# EAGLE board BEP32_6panel_Seed_wMilling_tvm802 (EAGLE 6.5.0), part 1 of 5
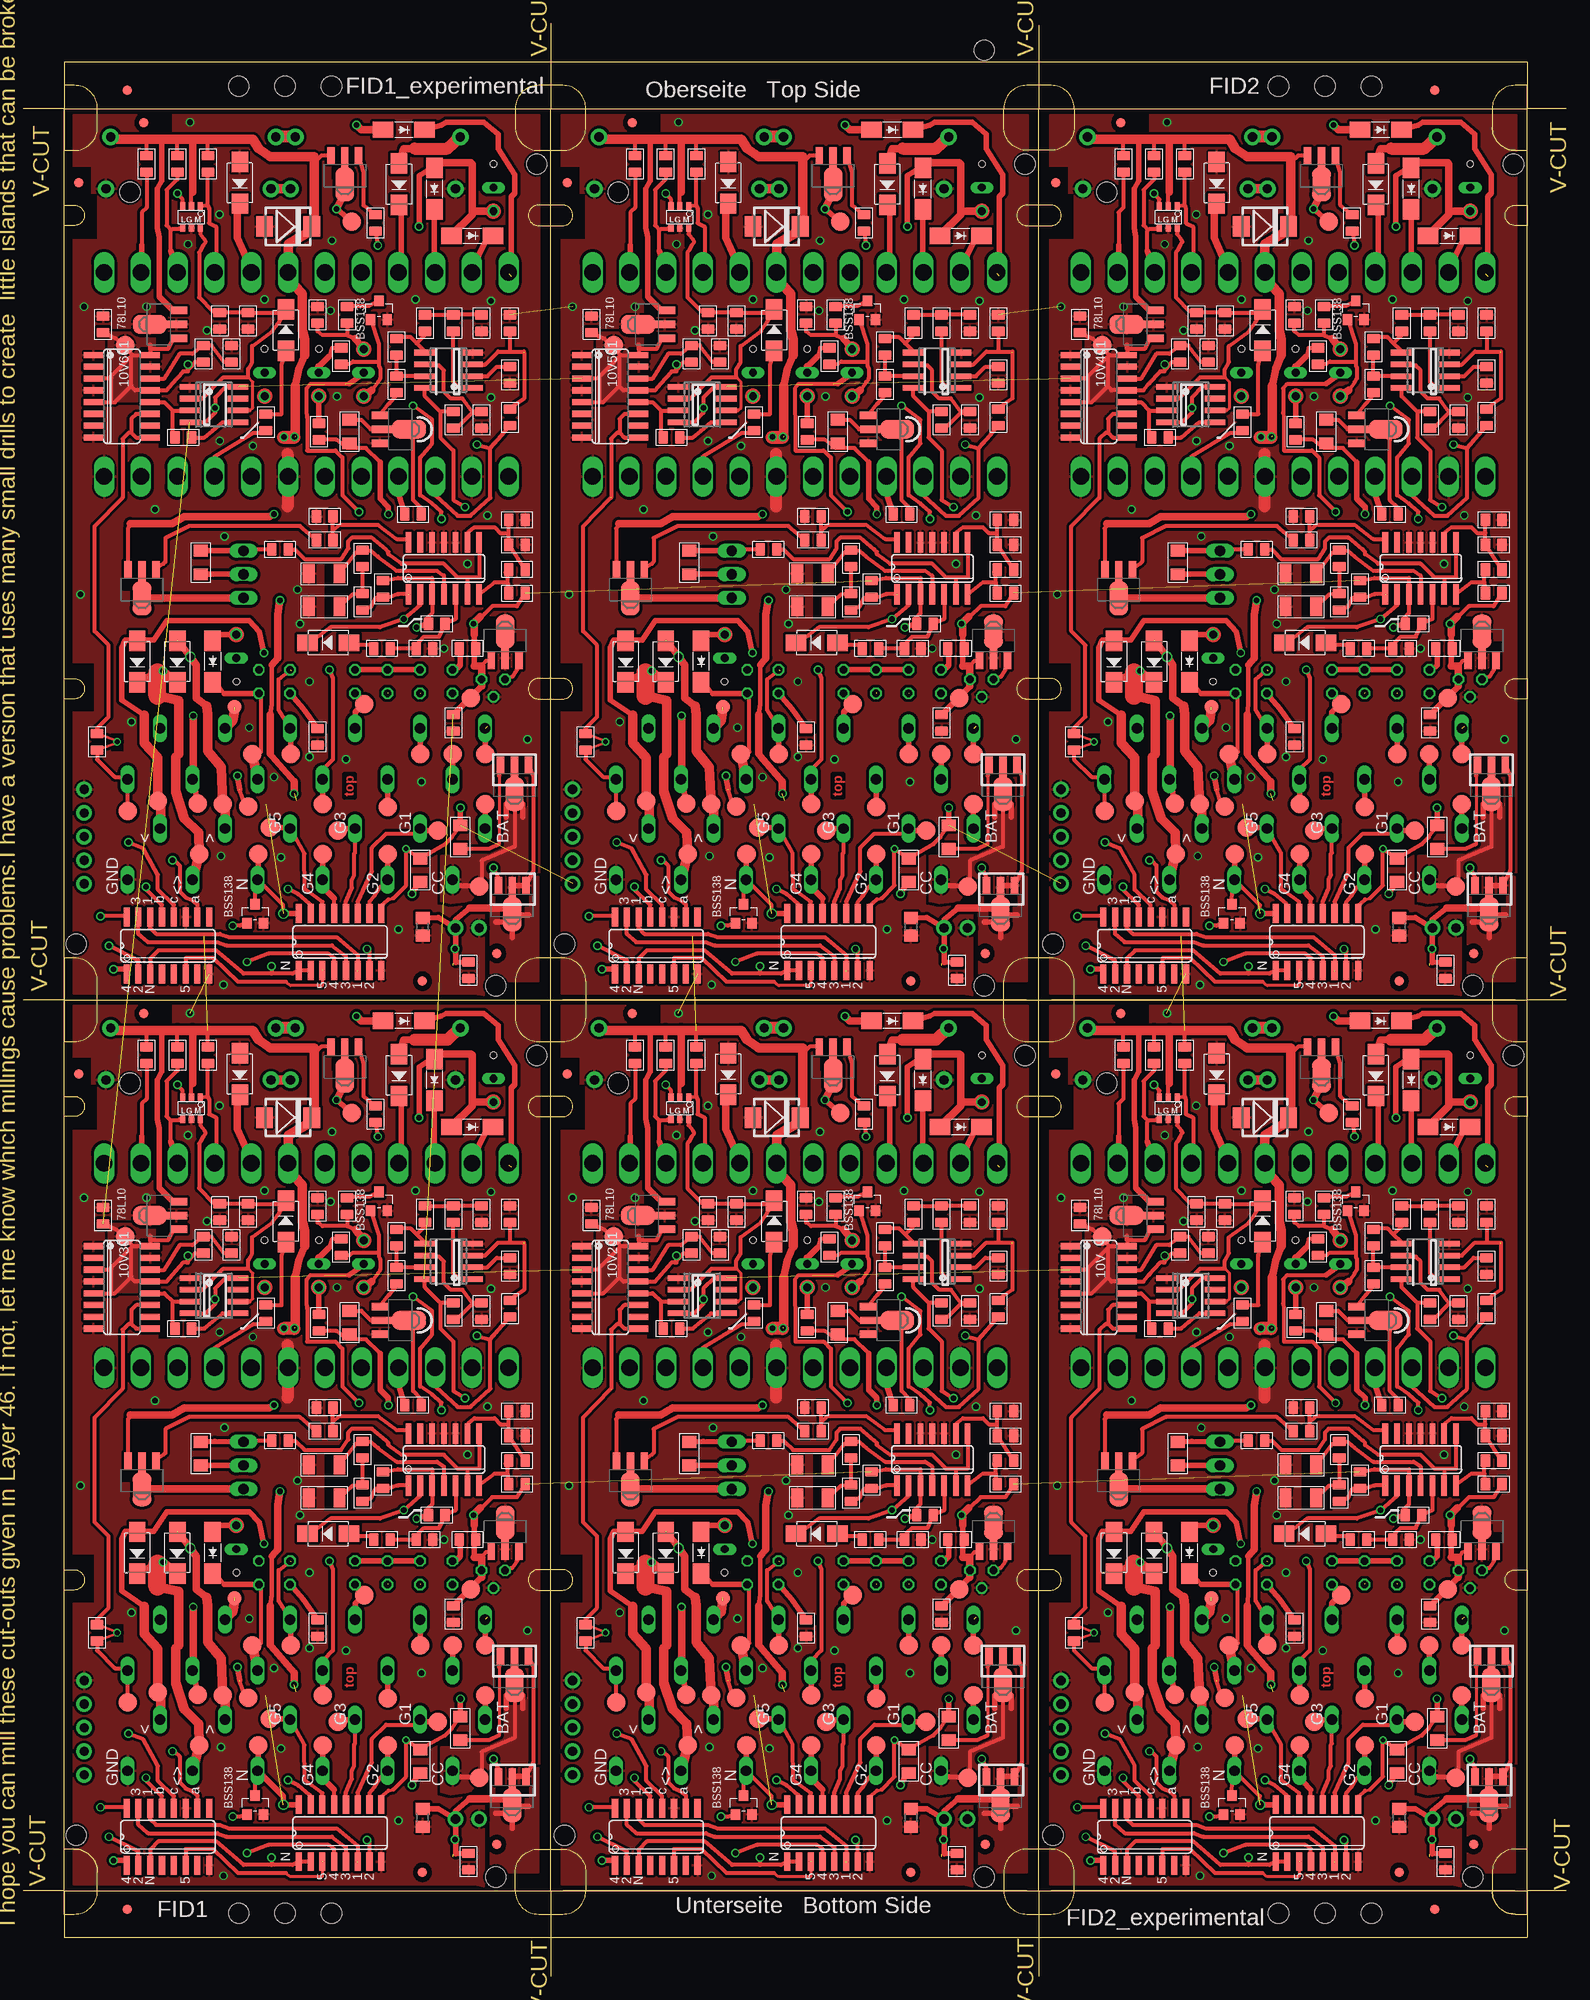
[diagram p0: board, top side]
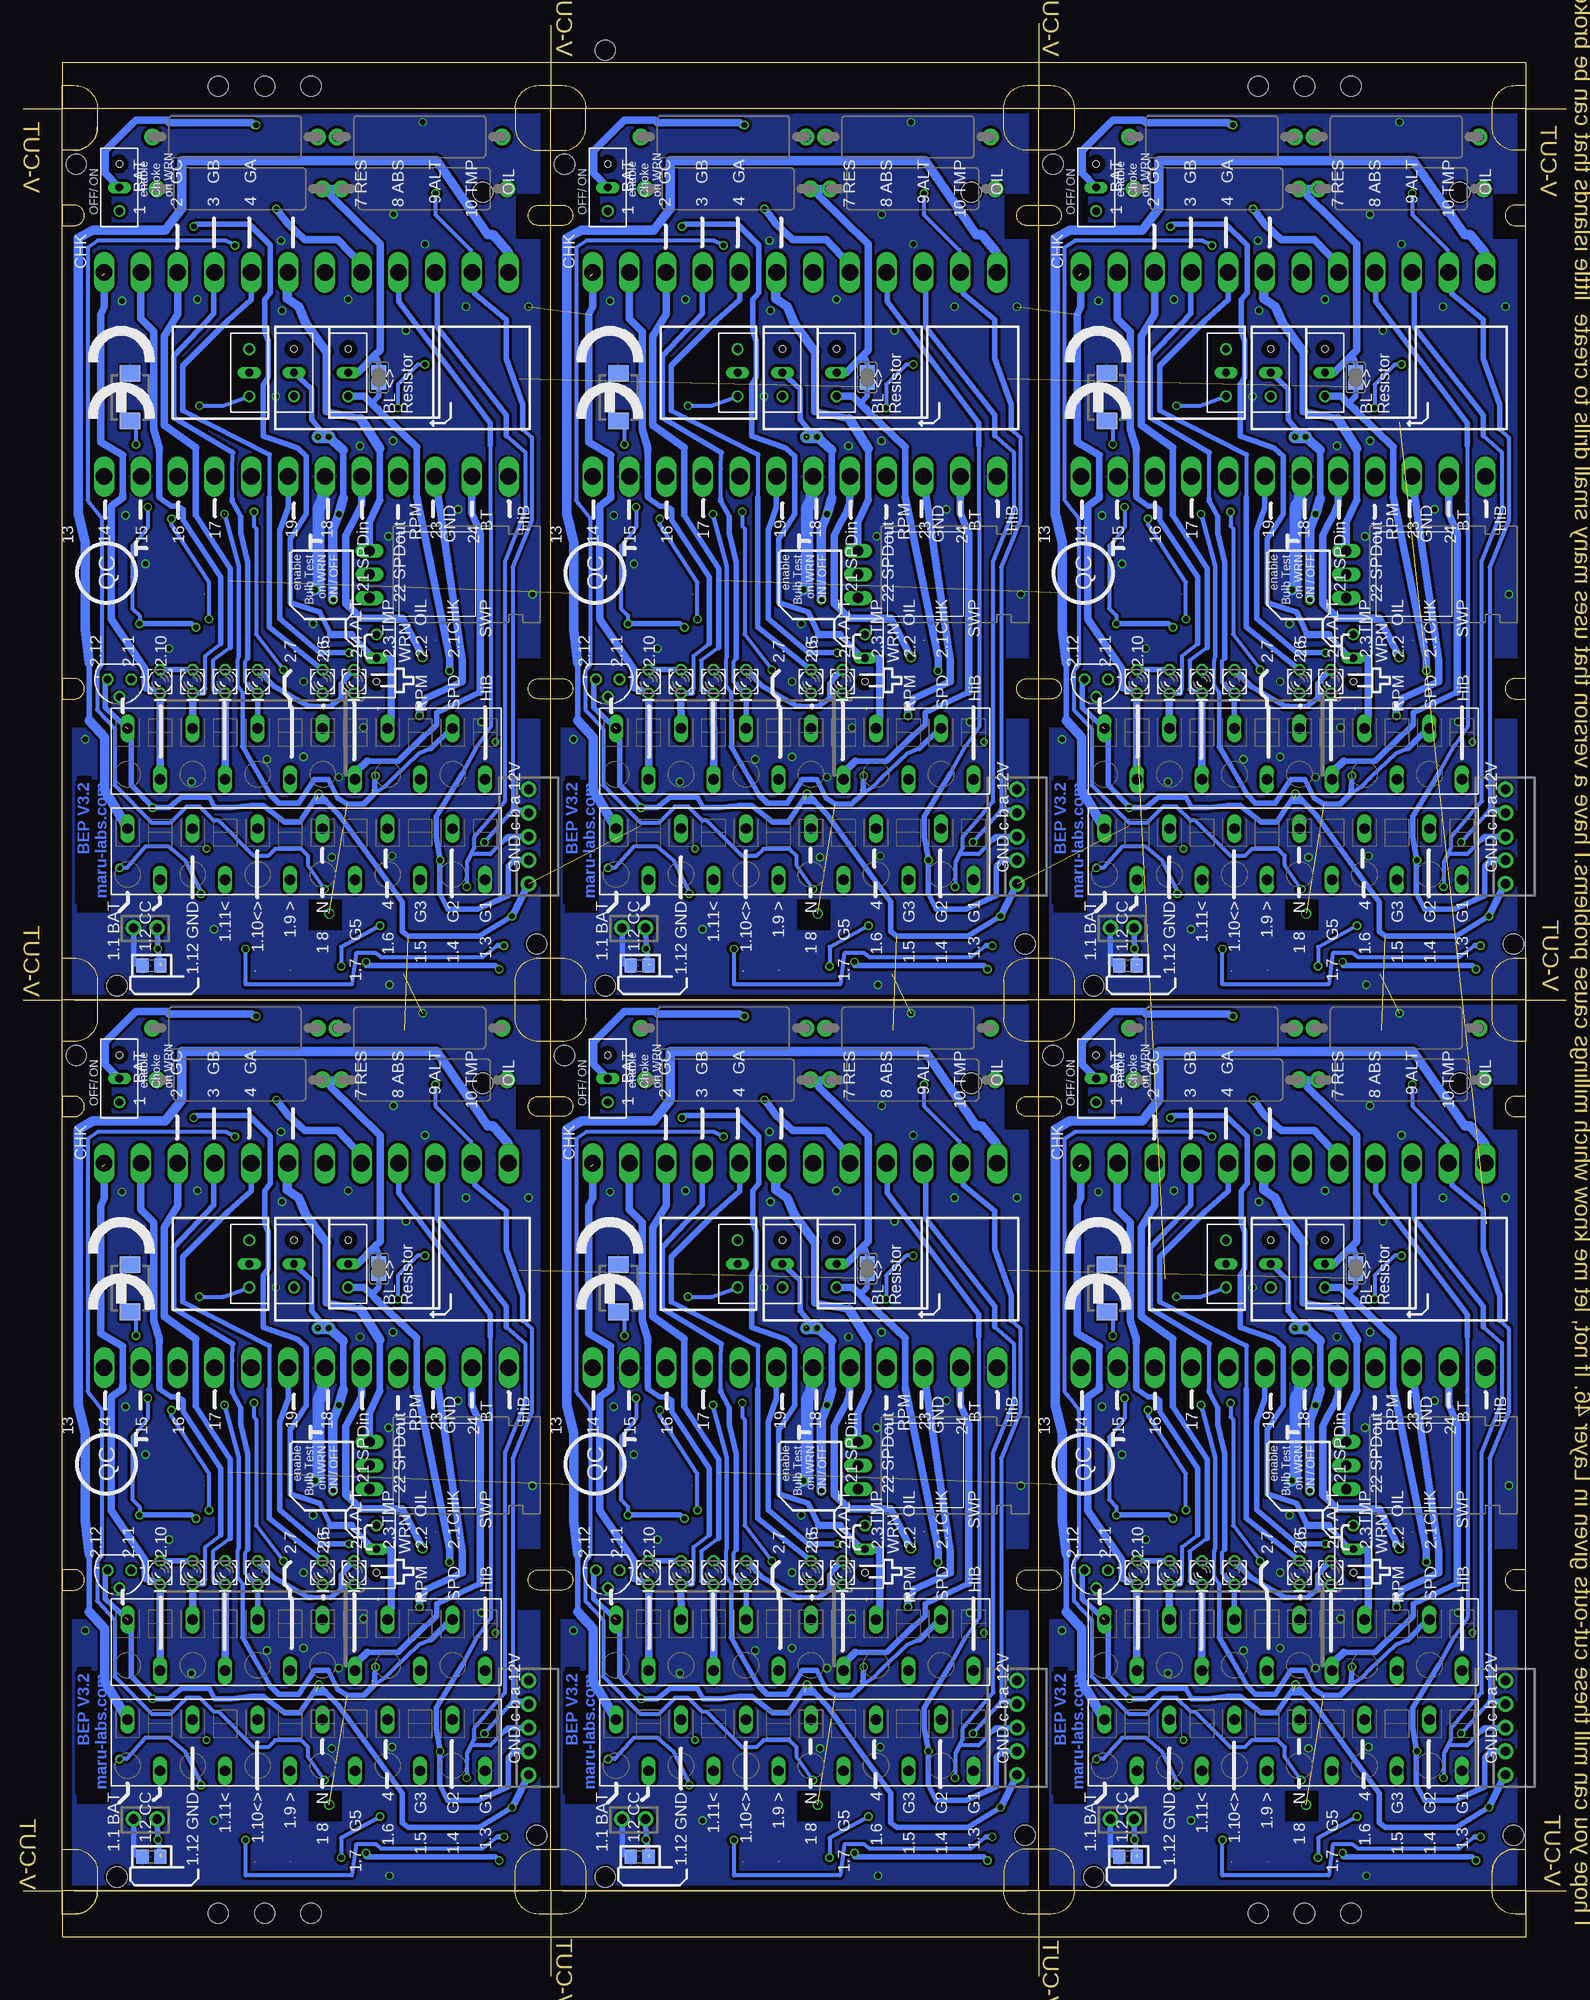
[diagram p1: board, bottom side, seen from below]

Size 166.2 x 210.4 mm. Coordinates in mm from the lower left corner, seen from the top.
Outline: 45 segments
Copper layers (1*16): Top 0.035mm / dielectric 1.5mm / Bottom 0.035mm
Design rules "Vorlage BEP3 und hoeher multi-cb_035um-cu": minimum track width 6mil, minimum drill 12mil, track to track 12mil, track to pad 12mil, pad to pad 6mil, via to via 6mil, smd to smd 6mil, copper to edge 10mil, drill to drill 8mil, minimum pad ring 8mil, minimum via ring 6mil, stop-mask expansion 3mil, vias tented up to drill 0mil, thermal gap 8mil
Holes 2.18 mm at 156.1,10.7 116.7,96.2 103.5,10.7 64.1,96.2 50.9,10.7 11.5,96.2 156.1,106.7 116.7,192.2 103.5,106.7 64.1,192.2 50.9,106.7 11.5,192.2 160.5,195.2 110.9,111.2 160.5,99.2 110.9,15.2 107.9,99.2 107.9,195.2 58.3,111.2 58.3,15.2 55.3,99.2 5.7,15.2 5.7,111.2 55.3,195.2 23.2,6.8 145.2,6.8 140.2,6.8 28.2,6.8 103.5,207.5 23.2,203.6 145.2,203.6 140.2,203.6 28.2,203.6 135.2,6.8 33.2,6.8 33.2,203.6 135.2,203.6
tRestrict: area 137.7,50.2 to 141,56.7; area 114.7,36 to 116,37.9; area 143.4,67.6 to 145.4,69.4; area 115.8,53.3 to 120.1,54.7; area 154.8,46.5 to 159.3,47.8; area 154.9,47.8 to 156.1,50.5; area 156.1,19.2 to 159.6,20.6; area 119.5,79.5 to 120.8,84.2; area 138.4,97.6 to 139.6,99.2; area 123.8,90.3 to 124,91.4; area 119,102.7 to 121.2,104.6; area 109.8,95.6 to 112.5,98.9; 78 more areas
bRestrict: area 156.9,18.6 to 160.4,28.8; area 158.9,28.7 to 160.4,33.3; area 158.9,38.5 to 161.1,45; area 110.5,39.5 to 112.9,46; area 156.7,90.8 to 160.5,96.8; area 131.9,16.7 to 135.5,20; area 110.1,91.2 to 113.1,96; area 104.2,18.6 to 107.8,28.8; area 106.3,28.7 to 107.8,33.3; area 106.3,38.5 to 108.5,45; area 57.9,39.5 to 60.3,46; area 104.1,90.8 to 107.9,96.8; 30 more areas
Milling: 180 lines

## Footprints (pad centres in the part's own frame; a part is rotated, then mirrored left to right if it is on the bottom)
12-PIN = drill 1.118 long: 1 19.25,-2.45; 2 15.75,3.05; 3 12.25,-2.45; 4 8.75,3.05; 5 5.25,-2.45; 6 1.75,3.05; 7 -1.75,-2.45; 8 -5.25,3.05; 9 -8.75,-2.45; 10 -12.25,3.05; 11 -15.75,-2.45; 12 -19.25,3.05
B2.0 = smd 2 x 2: TP 0,0
C0805 = smd 1.397 x 1.016: 1 0,0.889; 2 0,-0.889
C1206 = smd 1.27 x 2.032: 1 -1.651,0; 2 1.651,0
DO214AA = smd 1.8 x 2.2: A 2.55,0; C -2.55,0
DO-214AC = smd 2.2 x 1.77: 1 -2.242,0; 2 2.242,0
DO214AA_BI = smd 1.8 x 2.2: A 2.45,0; C -2.65,0
DO-214AC_SLIM = smd 2.2 x 1.77: 1 -2.242,0; 2 2.242,0
FIDUCIAL_1MM = smd 1 x 1: 1 0,0
FIDUCIAL_1MM_WITH_SOLDERMASK = smd 1 x 1: 1 0,0
SO08 = smd 0.6 x 2.2: 1 -1.905,-2.6; 2 -0.635,-2.6; 3 0.635,-2.6; 4 1.905,-2.6; 5 1.905,2.6; 6 0.635,2.6; 7 -0.635,2.6; 8 -1.905,2.6
SOT89_ROUND = smd 0.8 x 1.8: 1 -1.499,-2.181; 3 1.499,-2.181 | smd 0.8 x 2.3: 2 0,-1.927 | smd 2.032 x 3.65: 2@1 0,0.94
78LXX = drill 0.813 octagon: GND 0,1.905; IN 1.27,0; OUT -1.27,0
SO16 = smd 0.66 x 2.032: 1 -4.445,-3.073; 2 -3.175,-3.073; 3 -1.905,-3.073; 4 -0.635,-3.073; 5 0.635,-3.073; 6 1.905,-3.073; 7 3.175,-3.073; 8 4.445,-3.073; 9 4.445,3.073; 10 3.175,3.073; 11 1.905,3.073; 12 0.635,3.073; 13 -0.635,3.073; 14 -1.905,3.073; 15 -3.175,3.073; 16 -4.445,3.073
SOT457R_PHILIPS = smd 0.55 x 0.8: 1 -0.95,-1.2; 2 0,-1.2; 3 0.95,-1.2; 4 0.95,1.2; 5 0,1.2; 6 -0.95,1.2
SO14 = smd 0.6 x 2.2: 1 -3.81,-2.8; 2 -2.54,-2.8; 3 -1.27,-2.8; 4 0,-2.8; 5 1.27,-2.8; 6 2.54,-2.8; 7 3.81,-2.8; 8 3.81,2.8; 9 2.54,2.8; 10 1.27,2.8; 11 0,2.8; 12 -1.27,2.8; 13 -2.54,2.8; 14 -3.81,2.8
TO220H_NOHOLE = drill 1.118 long: 1 -2.54,-10.16; 2 0,-10.16; 3 2.54,-10.16
JP2_SMALLPADS = drill 0.85: 1 -2.54,0 | drill 0.85 long: 2 0,0 | hole 0.7: 2.54,0
JP2_ORIG_SMALLPADS = drill 0.85: 1 -2.54,0; 3 2.54,0 | drill 0.85 long: 2 0,0
LD260 = drill 0.813 octagon: A -1.27,0; K 1.27,0
SOT89 = smd 0.8 x 1.8: 1 -1.499,-2.181; 3 1.499,-2.181 | smd 0.8 x 2.3: 2 0,-1.927 | smd 2.032 x 3.65: 2@1 0,0.94
SOT-23 = smd 1.016 x 1.143: 1 -0.889,-1.016; 2 0.889,-1.016; 3 0,1.016
R0805 = smd 1.397 x 1.016: 1 0,0.889; 2 0,-0.889
R1206 = smd 1.27 x 1.524: 1 -1.27,0; 2 1.27,0
R0805' = smd 1.3 x 1.5: 1 -0.95,0; 2 0.95,0
V235/17_1MM = drill 1 pad 1.778: 1 -8.89,0; 2 8.89,0
SJ = smd 1.2 x 1.6: 1 -0.725,0; 2 0.725,0
B1,27 = smd 1.5 x 1.5: TP 0,0
24-PIN_V2 = drill 1.778 long: 1 -21.78,-11; 2 -17.82,-11; 3 -13.86,-11; 4 -9.9,-11; 5 -5.94,-11; 6 -1.98,-11; 7 1.98,-11; 8 5.94,-11; 9 9.9,-11; 10 13.86,-11; 11 17.82,-11; 12 21.78,-11; 13 -21.78,11; 14 -17.82,11; 15 -13.86,11; 16 -9.9,11; 17 -5.94,11; 18 -1.98,11; 19 1.98,11; 20 5.94,11; 21 9.9,11; 22 13.86,11; 23 17.82,11; 24 21.78,11
22-23-2021 = drill 1 pad 1.676: 1 -1.27,0; 2 1.27,0
22-23-2051 = drill 1 pad 1.676: 1 -5.08,0; 2 -2.54,0; 3 0,0; 4 2.54,0; 5 5.08,0

## Placement (x,y rotation side)
1  [12-PIN]  135.7,25.19 180 bottom
2  [12-PIN]  135.7,35.98 180 bottom
3  [12-PIN]  83.1,25.19 180 bottom
4  [12-PIN]  83.1,35.98 180 bottom
5  [12-PIN]  30.5,25.19 180 bottom
6  [12-PIN]  30.5,35.98 180 bottom
6V  TPSB2.0  [B2.0]  153.42,41.7 90 top
6V201  TPSB2.0  [B2.0]  100.82,41.7 90 top
6V301  TPSB2.0  [B2.0]  48.22,41.7 90 top
6V401  TPSB2.0  [B2.0]  153.42,137.7 90 top
6V501  TPSB2.0  [B2.0]  100.82,137.7 90 top
6V601  TPSB2.0  [B2.0]  48.22,137.7 90 top
10V  TPSB2.0  [B2.0]  116.2,79.7 90 top
10V201  TPSB2.0  [B2.0]  63.6,79.7 90 top
10V301  TPSB2.0  [B2.0]  11,79.7 90 top
10V401  TPSB2.0  [B2.0]  116.2,175.7 90 top
10V501  TPSB2.0  [B2.0]  63.6,175.7 90 top
10V601  TPSB2.0  [B2.0]  11,175.7 90 top
13  [12-PIN]  135.7,121.19 180 bottom
14  [12-PIN]  135.7,131.98 180 bottom
15  [12-PIN]  83.1,121.19 180 bottom
16  [12-PIN]  83.1,131.98 180 bottom
17  [12-PIN]  30.5,121.19 180 bottom
18  [12-PIN]  30.5,131.98 180 bottom
C101  4.7u  [C0805]  157.61,82.09 180 top
C102  100nF  [C0805]  113.8,81.96 180 top
C103  100nF,  [C0805]  154.56,82.09 0 top
C104  100nF,  [C0805]  151.52,39.03 0 top
C105  100nF.  [C0805]  158.37,58.21 90 top
C106  100nF.  [C0805]  137.67,61.26 90 top
C107  100u  [C1206]  137.61,51.54 180 top
C108  100u  [C1206]  137.61,55.1 180 top
C109  2.2nF  [C0805]  129.42,82.34 180 top
C110  100nF  [C0805]  127.64,78.78 180 top
C201  4.7u  [C0805]  105.01,82.09 180 top
C202  100nF  [C0805]  61.2,81.96 180 top
C203  100nF,  [C0805]  101.96,82.09 0 top
C204  100nF,  [C0805]  98.92,39.03 0 top
C205  100nF.  [C0805]  105.77,58.21 90 top
C206  100nF.  [C0805]  85.07,61.26 90 top
C207  100u  [C1206]  85.01,51.54 180 top
C208  100u  [C1206]  85.01,55.1 180 top
C209  2.2nF  [C0805]  76.82,82.34 180 top
C210  100nF  [C0805]  75.04,78.78 180 top
C301  4.7u  [C0805]  52.41,82.09 180 top
C302  100nF  [C0805]  8.6,81.96 180 top
C303  100nF,  [C0805]  49.36,82.09 0 top
C304  100nF,  [C0805]  46.32,39.03 0 top
C305  100nF.  [C0805]  53.17,58.21 90 top
C306  100nF.  [C0805]  32.47,61.26 90 top
C307  100u  [C1206]  32.41,51.54 180 top
C308  100u  [C1206]  32.41,55.1 180 top
C309  2.2nF  [C0805]  24.22,82.34 180 top
C310  100nF  [C0805]  22.44,78.78 180 top
C401  4.7u  [C0805]  157.61,178.09 180 top
C402  100nF  [C0805]  113.8,177.96 180 top
C403  100nF,  [C0805]  154.56,178.09 0 top
C404  100nF,  [C0805]  151.52,135.03 0 top
C405  100nF.  [C0805]  158.37,154.21 90 top
C406  100nF.  [C0805]  137.67,157.26 90 top
C407  100u  [C1206]  137.61,147.54 180 top
C408  100u  [C1206]  137.61,151.1 180 top
C409  2.2nF  [C0805]  129.42,178.34 180 top
C410  100nF  [C0805]  127.64,174.78 180 top
C501  4.7u  [C0805]  105.01,178.09 180 top
C502  100nF  [C0805]  61.2,177.96 180 top
C503  100nF,  [C0805]  101.96,178.09 0 top
C504  100nF,  [C0805]  98.92,135.03 0 top
C505  100nF.  [C0805]  105.77,154.21 90 top
C506  100nF.  [C0805]  85.07,157.26 90 top
C507  100u  [C1206]  85.01,147.54 180 top
C508  100u  [C1206]  85.01,151.1 180 top
C509  2.2nF  [C0805]  76.82,178.34 180 top
C510  100nF  [C0805]  75.04,174.78 180 top
C601  4.7u  [C0805]  52.41,178.09 180 top
C602  100nF  [C0805]  8.6,177.96 180 top
C603  100nF,  [C0805]  49.36,178.09 0 top
C604  100nF,  [C0805]  46.32,135.03 0 top
C605  100nF.  [C0805]  53.17,154.21 90 top
C606  100nF.  [C0805]  32.47,157.26 90 top
C607  100u  [C1206]  32.41,147.54 180 top
C608  100u  [C1206]  32.41,151.1 180 top
C609  2.2nF  [C0805]  24.22,178.34 180 top
C610  100nF  [C0805]  22.44,174.78 180 top
D101  SM6T  [DO214AA]  133.74,92.5 180 top
D102  1N4007,  [DO-214AC]  121.8,45.64 270 top
D103  1N4007,  [DO-214AC]  117.48,45.64 270 top
D104  SM6TDO214AA_BI  [DO214AA_BI]  154.69,74.21 90 bottom
D105  1N4007.  [DO-214AC]  128.53,97.2 270 top
D106  1N4007.  [DO-214AC]  145.67,97.07 270 top
D107  1N5817  [DO-214AC_SLIM]  149.48,96.56 270 top
D108  1N5817.  [DO-214AC_SLIM]  153.56,91.5 0 top
D109  1N5817.  [DO-214AC_SLIM]  146.19,102.93 0 top
D110  1N5817  [DO-214AC_SLIM]  125.61,45.64 270 top
D111  1N4007  [DO-214AC]  138.05,47.67 180 top
D112  1N4007  [DO-214AC]  133.48,81.32 90 top
D201  SM6T  [DO214AA]  81.14,92.5 180 top
D202  1N4007,  [DO-214AC]  69.2,45.64 270 top
D203  1N4007,  [DO-214AC]  64.88,45.64 270 top
D204  SM6TDO214AA_BI  [DO214AA_BI]  102.09,74.21 90 bottom
D205  1N4007.  [DO-214AC]  75.93,97.2 270 top
D206  1N4007.  [DO-214AC]  93.07,97.07 270 top
D207  1N5817  [DO-214AC_SLIM]  96.88,96.56 270 top
D208  1N5817.  [DO-214AC_SLIM]  100.96,91.5 0 top
D209  1N5817.  [DO-214AC_SLIM]  93.59,102.93 0 top
D210  1N5817  [DO-214AC_SLIM]  73.01,45.64 270 top
D211  1N4007  [DO-214AC]  85.45,47.67 180 top
D212  1N4007  [DO-214AC]  80.88,81.32 90 top
D301  SM6T  [DO214AA]  28.54,92.5 180 top
D302  1N4007,  [DO-214AC]  16.6,45.64 270 top
D303  1N4007,  [DO-214AC]  12.28,45.64 270 top
D304  SM6TDO214AA_BI  [DO214AA_BI]  49.49,74.21 90 bottom
D305  1N4007.  [DO-214AC]  23.33,97.2 270 top
D306  1N4007.  [DO-214AC]  40.47,97.07 270 top
D307  1N5817  [DO-214AC_SLIM]  44.28,96.56 270 top
D308  1N5817.  [DO-214AC_SLIM]  48.36,91.5 0 top
D309  1N5817.  [DO-214AC_SLIM]  40.99,102.93 0 top
D310  1N5817  [DO-214AC_SLIM]  20.41,45.64 270 top
D311  1N4007  [DO-214AC]  32.85,47.67 180 top
D312  1N4007  [DO-214AC]  28.28,81.32 90 top
D401  SM6T  [DO214AA]  133.74,188.5 180 top
D402  1N4007,  [DO-214AC]  121.8,141.64 270 top
D403  1N4007,  [DO-214AC]  117.48,141.64 270 top
D404  SM6TDO214AA_BI  [DO214AA_BI]  154.69,170.21 90 bottom
D405  1N4007.  [DO-214AC]  128.53,193.2 270 top
D406  1N4007.  [DO-214AC]  145.67,193.07 270 top
D407  1N5817  [DO-214AC_SLIM]  149.48,192.56 270 top
D408  1N5817.  [DO-214AC_SLIM]  153.56,187.5 0 top
D409  1N5817.  [DO-214AC_SLIM]  146.19,198.93 0 top
D410  1N5817  [DO-214AC_SLIM]  125.61,141.64 270 top
D411  1N4007  [DO-214AC]  138.05,143.67 180 top
D412  1N4007  [DO-214AC]  133.48,177.32 90 top
D501  SM6T  [DO214AA]  81.14,188.5 180 top
D502  1N4007,  [DO-214AC]  69.2,141.64 270 top
D503  1N4007,  [DO-214AC]  64.88,141.64 270 top
D504  SM6TDO214AA_BI  [DO214AA_BI]  102.09,170.21 90 bottom
D505  1N4007.  [DO-214AC]  75.93,193.2 270 top
D506  1N4007.  [DO-214AC]  93.07,193.07 270 top
D507  1N5817  [DO-214AC_SLIM]  96.88,192.56 270 top
D508  1N5817.  [DO-214AC_SLIM]  100.96,187.5 0 top
D509  1N5817.  [DO-214AC_SLIM]  93.59,198.93 0 top
D510  1N5817  [DO-214AC_SLIM]  73.01,141.64 270 top
D511  1N4007  [DO-214AC]  85.45,143.67 180 top
D512  1N4007  [DO-214AC]  80.88,177.32 90 top
D601  SM6T  [DO214AA]  28.54,188.5 180 top
D602  1N4007,  [DO-214AC]  16.6,141.64 270 top
D603  1N4007,  [DO-214AC]  12.28,141.64 270 top
D604  SM6TDO214AA_BI  [DO214AA_BI]  49.49,170.21 90 bottom
D605  1N4007.  [DO-214AC]  23.33,193.2 270 top
D606  1N4007.  [DO-214AC]  40.47,193.07 270 top
D607  1N5817  [DO-214AC_SLIM]  44.28,192.56 270 top
D608  1N5817.  [DO-214AC_SLIM]  48.36,187.5 0 top
D609  1N5817.  [DO-214AC_SLIM]  40.99,198.93 0 top
D610  1N5817  [DO-214AC_SLIM]  20.41,141.64 270 top
D611  1N4007  [DO-214AC]  32.85,143.67 180 top
D612  1N4007  [DO-214AC]  28.28,177.32 90 top
FID1  FIDUCIAL  [FIDUCIAL_1MM]  152,203.2 90 top
FID1B  FIDUCIALFIDUCIAL_1MM_WITH_SOLDERMASK  [FIDUCIAL_1MM_WITH_SOLDERMASK]  11.2,203.2 90 top
FID2  FIDUCIAL  [FIDUCIAL_1MM]  11.2,7.2 90 top
FID2B  FIDUCIALFIDUCIAL_1MM_WITH_SOLDERMASK  [FIDUCIAL_1MM_WITH_SOLDERMASK]  152,7.2 90 top
FID101  FIDUCIAL  [FIDUCIAL_1MM]  111.2,97.2 90 top
FID102  FIDUCIAL  [FIDUCIAL_1MM]  148.2,11.2 90 top
FID103  FIDUCIAL  [FIDUCIAL_1MM]  156.2,14.2 90 top
FID104  FIDUCIAL  [FIDUCIAL_1MM]  118.2,103.7 90 top
FID201  FIDUCIAL  [FIDUCIAL_1MM]  58.6,97.2 90 top
FID202  FIDUCIAL  [FIDUCIAL_1MM]  95.6,11.2 90 top
FID203  FIDUCIAL  [FIDUCIAL_1MM]  103.6,14.2 90 top
FID204  FIDUCIAL  [FIDUCIAL_1MM]  65.6,103.7 90 top
FID301  FIDUCIAL  [FIDUCIAL_1MM]  6,97.2 90 top
FID302  FIDUCIAL  [FIDUCIAL_1MM]  43,11.2 90 top
FID303  FIDUCIAL  [FIDUCIAL_1MM]  51,14.2 90 top
FID304  FIDUCIAL  [FIDUCIAL_1MM]  13,103.7 90 top
FID401  FIDUCIAL  [FIDUCIAL_1MM]  111.2,193.2 90 top
FID402  FIDUCIAL  [FIDUCIAL_1MM]  148.2,107.2 90 top
FID403  FIDUCIAL  [FIDUCIAL_1MM]  156.2,110.2 90 top
FID404  FIDUCIAL  [FIDUCIAL_1MM]  118.2,199.7 90 top
FID501  FIDUCIAL  [FIDUCIAL_1MM]  58.6,193.2 90 top
FID502  FIDUCIAL  [FIDUCIAL_1MM]  95.6,107.2 90 top
FID503  FIDUCIAL  [FIDUCIAL_1MM]  103.6,110.2 90 top
FID504  FIDUCIAL  [FIDUCIAL_1MM]  65.6,199.7 90 top
FID601  FIDUCIAL  [FIDUCIAL_1MM]  6,193.2 90 top
FID602  FIDUCIAL  [FIDUCIAL_1MM]  43,107.2 90 top
FID603  FIDUCIAL  [FIDUCIAL_1MM]  51,110.2 90 top
FID604  FIDUCIAL  [FIDUCIAL_1MM]  13,199.7 90 top
IC101  LM2904  [SO08]  151.01,77.01 90 top
IC102  78L06  [SOT89_ROUND]  157.1,47.92 0 top
IC103  6V pos  [78LXX]  155.83,43.73 180 bottom
IC104  78L10  [SOT89_ROUND]  119.77,81.96 90 top
IC105  4028  [SO16]  120.78,15.03 0 top
IC106  NUP4304SOT457_R  [SOT457R_PHILIPS]  123.32,93.52 180 top
IC107  ULN2004  [SO16]  139.32,15.43 0 top
IC108  LM339  [SO14]  150.5,55.67 0 top
IC109  317TO202H_NOHOLE  [TO220H_NOHOLE]  118.75,55.04 270 bottom
IC110  555  [SO08]  125.73,73.32 270 top
IC111  4538  [SO16]  115.83,74.21 270 top
IC201  LM2904  [SO08]  98.41,77.01 90 top
IC202  78L06  [SOT89_ROUND]  104.5,47.92 0 top
IC203  6V pos  [78LXX]  103.23,43.73 180 bottom
IC204  78L10  [SOT89_ROUND]  67.17,81.96 90 top
IC205  4028  [SO16]  68.18,15.03 0 top
IC206  NUP4304SOT457_R  [SOT457R_PHILIPS]  70.72,93.52 180 top
IC207  ULN2004  [SO16]  86.72,15.43 0 top
IC208  LM339  [SO14]  97.9,55.67 0 top
IC209  317TO202H_NOHOLE  [TO220H_NOHOLE]  66.15,55.04 270 bottom
IC210  555  [SO08]  73.14,73.32 270 top
IC211  4538  [SO16]  63.23,74.21 270 top
IC301  LM2904  [SO08]  45.81,77.01 90 top
IC302  78L06  [SOT89_ROUND]  51.9,47.92 0 top
IC303  6V pos  [78LXX]  50.63,43.73 180 bottom
IC304  78L10  [SOT89_ROUND]  14.57,81.96 90 top
IC305  4028  [SO16]  15.58,15.03 0 top
IC306  NUP4304SOT457_R  [SOT457R_PHILIPS]  18.12,93.52 180 top
IC307  ULN2004  [SO16]  34.12,15.43 0 top
IC308  LM339  [SO14]  45.3,55.67 0 top
IC309  317TO202H_NOHOLE  [TO220H_NOHOLE]  13.55,55.04 270 bottom
IC310  555  [SO08]  20.54,73.32 270 top
IC311  4538  [SO16]  10.63,74.21 270 top
IC401  LM2904  [SO08]  151.01,173.01 90 top
IC402  78L06  [SOT89_ROUND]  157.1,143.92 0 top
IC403  6V pos  [78LXX]  155.83,139.73 180 bottom
IC404  78L10  [SOT89_ROUND]  119.77,177.96 90 top
IC405  4028  [SO16]  120.78,111.03 0 top
IC406  NUP4304SOT457_R  [SOT457R_PHILIPS]  123.32,189.52 180 top
IC407  ULN2004  [SO16]  139.32,111.43 0 top
IC408  LM339  [SO14]  150.5,151.67 0 top
IC409  317TO202H_NOHOLE  [TO220H_NOHOLE]  118.75,151.03 270 bottom
IC410  555  [SO08]  125.73,169.32 270 top
IC411  4538  [SO16]  115.83,170.21 270 top
IC501  LM2904  [SO08]  98.41,173.01 90 top
IC502  78L06  [SOT89_ROUND]  104.5,143.92 0 top
IC503  6V pos  [78LXX]  103.23,139.73 180 bottom
IC504  78L10  [SOT89_ROUND]  67.17,177.96 90 top
IC505  4028  [SO16]  68.18,111.03 0 top
IC506  NUP4304SOT457_R  [SOT457R_PHILIPS]  70.72,189.52 180 top
IC507  ULN2004  [SO16]  86.72,111.43 0 top
IC508  LM339  [SO14]  97.9,151.67 0 top
IC509  317TO202H_NOHOLE  [TO220H_NOHOLE]  66.15,151.03 270 bottom
IC510  555  [SO08]  73.14,169.32 270 top
IC511  4538  [SO16]  63.23,170.21 270 top
IC601  LM2904  [SO08]  45.81,173.01 90 top
IC602  78L06  [SOT89_ROUND]  51.9,143.92 0 top
IC603  6V pos  [78LXX]  50.63,139.73 180 bottom
IC604  78L10  [SOT89_ROUND]  14.57,177.96 90 top
IC605  4028  [SO16]  15.58,111.03 0 top
IC606  NUP4304SOT457_R  [SOT457R_PHILIPS]  18.12,189.52 180 top
IC607  ULN2004  [SO16]  34.12,111.43 0 top
IC608  LM339  [SO14]  45.3,151.67 0 top
IC609  317TO202H_NOHOLE  [TO220H_NOHOLE]  13.55,151.03 270 bottom
IC610  555  [SO08]  20.54,169.32 270 top
IC611  4538  [SO16]  10.63,170.21 270 top
JP101  [JP2_SMALLPADS]  137.04,76.75 90 bottom
JP102  [JP2_SMALLPADS]  155.85,96.7 90 bottom
JP103  [JP2_SMALLPADS]  128.15,46.02 270 bottom
JP104  [JP2_SMALLPADS]  131.2,76.75 90 bottom
JP105  JP2E_ORIG  [JP2_ORIG_SMALLPADS]  141.86,76.75 90 bottom
JP201  [JP2_SMALLPADS]  84.44,76.75 90 bottom
JP202  [JP2_SMALLPADS]  103.25,96.7 90 bottom
JP203  [JP2_SMALLPADS]  75.55,46.02 270 bottom
JP204  [JP2_SMALLPADS]  78.6,76.75 90 bottom
JP205  JP2E_ORIG  [JP2_ORIG_SMALLPADS]  89.26,76.75 90 bottom
JP301  [JP2_SMALLPADS]  31.84,76.75 90 bottom
JP302  [JP2_SMALLPADS]  50.65,96.7 90 bottom
JP303  [JP2_SMALLPADS]  22.95,46.02 270 bottom
JP304  [JP2_SMALLPADS]  26,76.75 90 bottom
JP305  JP2E_ORIG  [JP2_ORIG_SMALLPADS]  36.66,76.75 90 bottom
JP401  [JP2_SMALLPADS]  137.04,172.75 90 bottom
JP402  [JP2_SMALLPADS]  155.85,192.7 90 bottom
JP403  [JP2_SMALLPADS]  128.15,142.02 270 bottom
JP404  [JP2_SMALLPADS]  131.2,172.75 90 bottom
JP405  JP2E_ORIG  [JP2_ORIG_SMALLPADS]  141.86,172.75 90 bottom
JP501  [JP2_SMALLPADS]  84.44,172.75 90 bottom
JP502  [JP2_SMALLPADS]  103.25,192.7 90 bottom
JP503  [JP2_SMALLPADS]  75.55,142.02 270 bottom
JP504  [JP2_SMALLPADS]  78.6,172.75 90 bottom
JP505  JP2E_ORIG  [JP2_ORIG_SMALLPADS]  89.26,172.75 90 bottom
JP601  [JP2_SMALLPADS]  31.84,172.75 90 bottom
JP602  [JP2_SMALLPADS]  50.65,192.7 90 bottom
JP603  [JP2_SMALLPADS]  22.95,142.02 270 bottom
JP604  [JP2_SMALLPADS]  26,172.75 90 bottom
JP605  JP2E_ORIG  [JP2_ORIG_SMALLPADS]  36.66,172.75 90 bottom
LED101  [LD260]  133.95,43.48 270 bottom
LED102  [LD260]  151.45,43.48 270 bottom
LED103  [LD260]  147.95,43.48 270 bottom
LED104  [LD260]  144.45,43.48 270 bottom
LED105  [LD260]  140.95,43.48 270 bottom
LED106  [LD260]  130.58,43.48 270 bottom
LED201  [LD260]  81.35,43.48 270 bottom
LED202  [LD260]  98.85,43.48 270 bottom
LED203  [LD260]  95.35,43.48 270 bottom
LED204  [LD260]  91.85,43.48 270 bottom
LED205  [LD260]  88.35,43.48 270 bottom
LED206  [LD260]  77.98,43.48 270 bottom
LED301  [LD260]  28.75,43.48 270 bottom
LED302  [LD260]  46.25,43.48 270 bottom
LED303  [LD260]  42.75,43.48 270 bottom
LED304  [LD260]  39.25,43.48 270 bottom
LED305  [LD260]  35.75,43.48 270 bottom
LED306  [LD260]  25.38,43.48 270 bottom
LED401  [LD260]  133.95,139.48 270 bottom
LED402  [LD260]  151.45,139.48 270 bottom
LED403  [LD260]  147.95,139.48 270 bottom
LED404  [LD260]  144.45,139.48 270 bottom
LED405  [LD260]  140.95,139.48 270 bottom
LED406  [LD260]  130.58,139.48 270 bottom
LED501  [LD260]  81.35,139.48 270 bottom
LED502  [LD260]  98.85,139.48 270 bottom
LED503  [LD260]  95.35,139.48 270 bottom
LED504  [LD260]  91.85,139.48 270 bottom
LED505  [LD260]  88.35,139.48 270 bottom
LED506  [LD260]  77.98,139.48 270 bottom
LED601  [LD260]  28.75,139.48 270 bottom
LED602  [LD260]  46.25,139.48 270 bottom
LED603  [LD260]  42.75,139.48 270 bottom
LED604  [LD260]  39.25,139.48 270 bottom
LED605  [LD260]  35.75,139.48 270 bottom
LED606  [LD260]  25.38,139.48 270 bottom
Q101  BA.  [SOT89]  158.12,32.3 180 top
Q102  BA.  [SOT89]  157.87,19.35 180 top
Q103  MY  [SOT89]  145.8,70.66 270 top
Q104  BA  [SOT89]  139.83,97.96 180 top
Q105  BA  [SOT89]  117.99,53.38 180 top
Q106  J1  [SOT-23]  130.18,18.46 0 top
Q107  J1  [SOT-23]  143.52,83.48 0 top
Q201  BA.  [SOT89]  105.52,32.3 180 top
Q202  BA.  [SOT89]  105.27,19.35 180 top
Q203  MY  [SOT89]  93.2,70.66 270 top
Q204  BA  [SOT89]  87.23,97.96 180 top
Q205  BA  [SOT89]  65.39,53.38 180 top
Q206  J1  [SOT-23]  77.58,18.46 0 top
Q207  J1  [SOT-23]  90.92,83.48 0 top
Q301  BA.  [SOT89]  52.92,32.3 180 top
Q302  BA.  [SOT89]  52.67,19.35 180 top
Q303  MY  [SOT89]  40.6,70.66 270 top
Q304  BA  [SOT89]  34.63,97.96 180 top
Q305  BA  [SOT89]  12.79,53.38 180 top
Q306  J1  [SOT-23]  24.98,18.46 0 top
Q307  J1  [SOT-23]  38.31,83.48 0 top
Q401  BA.  [SOT89]  158.12,128.3 180 top
Q402  BA.  [SOT89]  157.87,115.35 180 top
Q403  MY  [SOT89]  145.8,166.66 270 top
Q404  BA  [SOT89]  139.83,193.96 180 top
Q405  BA  [SOT89]  117.99,149.38 180 top
Q406  J1  [SOT-23]  130.18,114.46 0 top
Q407  J1  [SOT-23]  143.52,179.48 0 top
Q501  BA.  [SOT89]  105.52,128.3 180 top
Q502  BA.  [SOT89]  105.27,115.35 180 top
Q503  MY  [SOT89]  93.2,166.66 270 top
Q504  BA  [SOT89]  87.23,193.96 180 top
Q505  BA  [SOT89]  65.39,149.38 180 top
Q506  J1  [SOT-23]  77.58,114.46 0 top
Q507  J1  [SOT-23]  90.92,179.48 0 top
Q601  BA.  [SOT89]  52.92,128.3 180 top
Q602  BA.  [SOT89]  52.67,115.35 180 top
Q603  MY  [SOT89]  40.6,166.66 270 top
Q604  BA  [SOT89]  34.63,193.96 180 top
Q605  BA  [SOT89]  12.79,149.38 180 top
Q606  J1  [SOT-23]  24.98,114.46 0 top
Q607  J1  [SOT-23]  38.31,179.48 0 top
R101  102  [R0805]  153.17,12.36 0 top
R102  13  [R1206]  152.28,26.71 270 top
R103  R_user  [R0805']  148.21,17.07 270 top
R104  R_user  [R0805']  152.41,12.87 180 bottom
R105  4701  [R0805]  157.61,71.93 0 top
R106  13  [R1206]  147.96,23.16 270 top
R107  1002  [R0805]  157.61,76.5 180 top
R108  1002  [R0805]  151.52,82.09 0 top
R109  104  [R0805]  118.5,99.23 180 top
R110  104  [R0805]  121.8,99.23 180 top
R111  104  [R0805]  125.1,99.23 180 top
R112  102  [R0805]  148.47,82.09 0 top
R113  102  [R0805]  151.52,71.67 180 top
R114  102  [R0805]  154.56,71.67 180 top
R115  100  [R0805]  147.2,61.51 90 top
R116  4701  [R0805]  145.42,75.48 0 top
R117  2702  [R0805]  145.42,79.55 180 top
R118  13  [R1206]  140.34,70.41 270 top
R119  2201  [R0805]  137.04,70.4 180 top
R120  1002  [R0805]  132.85,57.7 270 top
R121  1502  [R0805]  158.37,53 90 top
R122  2702  [R0805]  158.37,55.54 90 top
R123  2702  [R0805]  158.37,60.88 270 top
R124  1002  [R0805]  143.96,53.45 0 top
R125  104  [R0805]  141.74,52.05 0 top
R126  4701  [R0805]  137.67,58.72 90 top
R127  47  [V235/17_1MM]  143.39,102.15 0 bottom
R128  102  [R0805]  143.13,92.88 180 top
R129  47  [V235/17_1MM]  123.51,102.15 0 bottom
R130  104  [R0805]  141.74,56.75 0 top
R131  1502  [R0805]  149.74,49.7 270 top
R132  1002  [R0805]  148.4,47.03 270 top
R133  2201  [R0805]  143.83,47.03 90 top
R134  13  [R1206]  124.34,56.3 270 top
R135  104  [R0805]  139.45,78.53 0 top
R136  47  [V235/17_1MM]  142.88,96.56 0 bottom
R137  47  [V235/17_1MM]  123,96.56 180 bottom
R138  100  [R0805]  140.09,82.98 180 top
R139  (101)  [R0805]  136.91,82.98 180 top
R140  2702  [R0805]  131.32,71.42 0 top
R141  104  [R0805]  126.37,82.34 0 top
R142  (1000)  [R0805]  153.04,47.03 90 top
R143  (101)  [R0805]  136.91,37.51 0 top
R144  (1002)  [R0805]  122.43,69.77 90 top
R145  2702  [R0805]  124.59,78.78 0 top
R146  (1002)  [R0805]  113.16,37 180 top
R201  102  [R0805]  100.57,12.36 0 top
R202  13  [R1206]  99.68,26.71 270 top
R203  R_user  [R0805']  95.61,17.07 270 top
R204  R_user  [R0805']  99.81,12.87 180 bottom
R205  4701  [R0805]  105.01,71.93 0 top
R206  13  [R1206]  95.36,23.16 270 top
R207  1002  [R0805]  105.01,76.5 180 top
R208  1002  [R0805]  98.92,82.09 0 top
R209  104  [R0805]  65.9,99.23 180 top
R210  104  [R0805]  69.2,99.23 180 top
R211  104  [R0805]  72.5,99.23 180 top
R212  102  [R0805]  95.87,82.09 0 top
R213  102  [R0805]  98.92,71.67 180 top
R214  102  [R0805]  101.96,71.67 180 top
R215  100  [R0805]  94.6,61.51 90 top
R216  4701  [R0805]  92.82,75.48 0 top
R217  2702  [R0805]  92.82,79.55 180 top
R218  13  [R1206]  87.74,70.41 270 top
R219  2201  [R0805]  84.44,70.4 180 top
R220  1002  [R0805]  80.25,57.7 270 top
R221  1502  [R0805]  105.77,53 90 top
R222  2702  [R0805]  105.77,55.54 90 top
R223  2702  [R0805]  105.77,60.88 270 top
R224  1002  [R0805]  91.36,53.45 0 top
R225  104  [R0805]  89.14,52.05 0 top
R226  4701  [R0805]  85.07,58.72 90 top
R227  47  [V235/17_1MM]  90.79,102.15 0 bottom
R228  102  [R0805]  90.53,92.88 180 top
R229  47  [V235/17_1MM]  70.91,102.15 0 bottom
R230  104  [R0805]  89.14,56.75 0 top
R231  1502  [R0805]  97.14,49.7 270 top
R232  1002  [R0805]  95.8,47.03 270 top
R233  2201  [R0805]  91.23,47.03 90 top
R234  13  [R1206]  71.74,56.3 270 top
R235  104  [R0805]  86.85,78.53 0 top
R236  47  [V235/17_1MM]  90.28,96.56 0 bottom
R237  47  [V235/17_1MM]  70.4,96.56 180 bottom
R238  100  [R0805]  87.49,82.98 180 top
R239  (101)  [R0805]  84.31,82.98 180 top
R240  2702  [R0805]  78.72,71.42 0 top
R241  104  [R0805]  73.77,82.34 0 top
R242  (1000)  [R0805]  100.44,47.03 90 top
R243  (101)  [R0805]  84.31,37.51 0 top
R244  (1002)  [R0805]  69.83,69.77 90 top
R245  2702  [R0805]  71.99,78.78 0 top
R246  (1002)  [R0805]  60.56,37 180 top
R301  102  [R0805]  47.97,12.36 0 top
R302  13  [R1206]  47.08,26.71 270 top
R303  R_user  [R0805']  43.01,17.07 270 top
R304  R_user  [R0805']  47.2,12.87 180 bottom
R305  4701  [R0805]  52.41,71.93 0 top
R306  13  [R1206]  42.76,23.16 270 top
R307  1002  [R0805]  52.41,76.5 180 top
R308  1002  [R0805]  46.32,82.09 0 top
R309  104  [R0805]  13.3,99.23 180 top
R310  104  [R0805]  16.6,99.23 180 top
R311  104  [R0805]  19.9,99.23 180 top
R312  102  [R0805]  43.27,82.09 0 top
R313  102  [R0805]  46.32,71.67 180 top
R314  102  [R0805]  49.36,71.67 180 top
R315  100  [R0805]  42,61.51 90 top
R316  4701  [R0805]  40.22,75.48 0 top
R317  2702  [R0805]  40.22,79.55 180 top
R318  13  [R1206]  35.14,70.41 270 top
R319  2201  [R0805]  31.84,70.4 180 top
R320  1002  [R0805]  27.65,57.7 270 top
R321  1502  [R0805]  53.17,53 90 top
R322  2702  [R0805]  53.17,55.54 90 top
R323  2702  [R0805]  53.17,60.88 270 top
R324  1002  [R0805]  38.76,53.45 0 top
R325  104  [R0805]  36.54,52.05 0 top
R326  4701  [R0805]  32.47,58.72 90 top
R327  47  [V235/17_1MM]  38.19,102.15 0 bottom
R328  102  [R0805]  37.93,92.88 180 top
R329  47  [V235/17_1MM]  18.31,102.15 0 bottom
R330  104  [R0805]  36.54,56.75 0 top
R331  1502  [R0805]  44.54,49.7 270 top
R332  1002  [R0805]  43.2,47.03 270 top
R333  2201  [R0805]  38.63,47.03 90 top
R334  13  [R1206]  19.14,56.3 270 top
R335  104  [R0805]  34.25,78.53 0 top
R336  47  [V235/17_1MM]  37.68,96.56 0 bottom
R337  47  [V235/17_1MM]  17.8,96.56 180 bottom
R338  100  [R0805]  34.89,82.98 180 top
R339  (101)  [R0805]  31.71,82.98 180 top
R340  2702  [R0805]  26.12,71.42 0 top
R341  104  [R0805]  21.17,82.34 0 top
R342  (1000)  [R0805]  47.84,47.03 90 top
R343  (101)  [R0805]  31.71,37.51 0 top
R344  (1002)  [R0805]  17.23,69.77 90 top
R345  2702  [R0805]  19.39,78.78 0 top
R346  (1002)  [R0805]  7.96,37 180 top
R401  102  [R0805]  153.17,108.36 0 top
R402  13  [R1206]  152.28,122.71 270 top
R403  R_user  [R0805']  148.21,113.07 270 top
R404  R_user  [R0805']  152.41,108.87 180 bottom
R405  4701  [R0805]  157.61,167.93 0 top
R406  13  [R1206]  147.96,119.16 270 top
R407  1002  [R0805]  157.61,172.5 180 top
R408  1002  [R0805]  151.52,178.09 0 top
R409  104  [R0805]  118.5,195.23 180 top
R410  104  [R0805]  121.8,195.23 180 top
R411  104  [R0805]  125.1,195.23 180 top
R412  102  [R0805]  148.47,178.09 0 top
R413  102  [R0805]  151.52,167.67 180 top
R414  102  [R0805]  154.56,167.67 180 top
R415  100  [R0805]  147.2,157.51 90 top
R416  4701  [R0805]  145.42,171.48 0 top
R417  2702  [R0805]  145.42,175.55 180 top
R418  13  [R1206]  140.34,166.41 270 top
R419  2201  [R0805]  137.04,166.4 180 top
R420  1002  [R0805]  132.85,153.7 270 top
R421  1502  [R0805]  158.37,149 90 top
R422  2702  [R0805]  158.37,151.54 90 top
R423  2702  [R0805]  158.37,156.88 270 top
R424  1002  [R0805]  143.96,149.45 0 top
R425  104  [R0805]  141.74,148.05 0 top
R426  4701  [R0805]  137.67,154.72 90 top
R427  47  [V235/17_1MM]  143.39,198.15 0 bottom
R428  102  [R0805]  143.13,188.88 180 top
R429  47  [V235/17_1MM]  123.51,198.15 0 bottom
R430  104  [R0805]  141.74,152.75 0 top
R431  1502  [R0805]  149.74,145.7 270 top
R432  1002  [R0805]  148.4,143.03 270 top
R433  2201  [R0805]  143.83,143.03 90 top
R434  13  [R1206]  124.34,152.3 270 top
R435  104  [R0805]  139.45,174.53 0 top
R436  47  [V235/17_1MM]  142.88,192.56 0 bottom
R437  47  [V235/17_1MM]  123,192.56 180 bottom
R438  100  [R0805]  140.09,178.97 180 top
R439  (101)  [R0805]  136.91,178.97 180 top
R440  2702  [R0805]  131.32,167.42 0 top
R441  104  [R0805]  126.37,178.34 0 top
R442  (1000)  [R0805]  153.04,143.03 90 top
R443  (101)  [R0805]  136.91,133.51 0 top
R444  (1002)  [R0805]  122.43,165.77 90 top
R445  2702  [R0805]  124.59,174.78 0 top
R446  (1002)  [R0805]  113.16,133 180 top
R501  102  [R0805]  100.57,108.36 0 top
R502  13  [R1206]  99.68,122.71 270 top
R503  R_user  [R0805']  95.61,113.07 270 top
R504  R_user  [R0805']  99.81,108.87 180 bottom
R505  4701  [R0805]  105.01,167.93 0 top
R506  13  [R1206]  95.36,119.16 270 top
R507  1002  [R0805]  105.01,172.5 180 top
R508  1002  [R0805]  98.92,178.09 0 top
R509  104  [R0805]  65.9,195.23 180 top
R510  104  [R0805]  69.2,195.23 180 top
R511  104  [R0805]  72.5,195.23 180 top
R512  102  [R0805]  95.87,178.09 0 top
R513  102  [R0805]  98.92,167.67 180 top
R514  102  [R0805]  101.96,167.67 180 top
R515  100  [R0805]  94.6,157.51 90 top
R516  4701  [R0805]  92.82,171.48 0 top
R517  2702  [R0805]  92.82,175.55 180 top
R518  13  [R1206]  87.74,166.41 270 top
R519  2201  [R0805]  84.44,166.4 180 top
R520  1002  [R0805]  80.25,153.7 270 top
R521  1502  [R0805]  105.77,149 90 top
R522  2702  [R0805]  105.77,151.54 90 top
R523  2702  [R0805]  105.77,156.88 270 top
R524  1002  [R0805]  91.36,149.45 0 top
R525  104  [R0805]  89.14,148.05 0 top
R526  4701  [R0805]  85.07,154.72 90 top
R527  47  [V235/17_1MM]  90.79,198.15 0 bottom
R528  102  [R0805]  90.53,188.88 180 top
R529  47  [V235/17_1MM]  70.91,198.15 0 bottom
R530  104  [R0805]  89.14,152.75 0 top
R531  1502  [R0805]  97.14,145.7 270 top
R532  1002  [R0805]  95.8,143.03 270 top
R533  2201  [R0805]  91.23,143.03 90 top
R534  13  [R1206]  71.74,152.3 270 top
R535  104  [R0805]  86.85,174.53 0 top
R536  47  [V235/17_1MM]  90.28,192.56 0 bottom
R537  47  [V235/17_1MM]  70.4,192.56 180 bottom
R538  100  [R0805]  87.49,178.97 180 top
R539  (101)  [R0805]  84.31,178.97 180 top
R540  2702  [R0805]  78.72,167.42 0 top
R541  104  [R0805]  73.77,178.34 0 top
R542  (1000)  [R0805]  100.44,143.03 90 top
R543  (101)  [R0805]  84.31,133.51 0 top
R544  (1002)  [R0805]  69.83,165.77 90 top
R545  2702  [R0805]  71.99,174.78 0 top
R546  (1002)  [R0805]  60.56,133 180 top
R601  102  [R0805]  47.97,108.36 0 top
R602  13  [R1206]  47.08,122.71 270 top
R603  R_user  [R0805']  43.01,113.07 270 top
R604  R_user  [R0805']  47.2,108.87 180 bottom
R605  4701  [R0805]  52.41,167.93 0 top
R606  13  [R1206]  42.76,119.16 270 top
R607  1002  [R0805]  52.41,172.5 180 top
R608  1002  [R0805]  46.32,178.09 0 top
R609  104  [R0805]  13.3,195.23 180 top
R610  104  [R0805]  16.6,195.23 180 top
R611  104  [R0805]  19.9,195.23 180 top
R612  102  [R0805]  43.27,178.09 0 top
R613  102  [R0805]  46.32,167.67 180 top
R614  102  [R0805]  49.36,167.67 180 top
R615  100  [R0805]  42,157.51 90 top
R616  4701  [R0805]  40.22,171.48 0 top
R617  2702  [R0805]  40.22,175.55 180 top
R618  13  [R1206]  35.14,166.41 270 top
R619  2201  [R0805]  31.84,166.4 180 top
R620  1002  [R0805]  27.65,153.7 270 top
R621  1502  [R0805]  53.17,149 90 top
R622  2702  [R0805]  53.17,151.54 90 top
R623  2702  [R0805]  53.17,156.88 270 top
R624  1002  [R0805]  38.76,149.45 0 top
R625  104  [R0805]  36.54,148.05 0 top
R626  4701  [R0805]  32.47,154.72 90 top
R627  47  [V235/17_1MM]  38.19,198.15 0 bottom
R628  102  [R0805]  37.93,188.88 180 top
R629  47  [V235/17_1MM]  18.31,198.15 0 bottom
R630  104  [R0805]  36.54,152.75 0 top
R631  1502  [R0805]  44.54,145.7 270 top
R632  1002  [R0805]  43.2,143.03 270 top
R633  2201  [R0805]  38.63,143.03 90 top
R634  13  [R1206]  19.14,152.3 270 top
R635  104  [R0805]  34.25,174.53 0 top
R636  47  [V235/17_1MM]  37.68,192.56 0 bottom
R637  47  [V235/17_1MM]  17.8,192.56 180 bottom
R638  100  [R0805]  34.89,178.97 180 top
R639  (101)  [R0805]  31.71,178.97 180 top
R640  2702  [R0805]  26.12,167.42 0 top
R641  104  [R0805]  21.17,178.34 0 top
R642  (1000)  [R0805]  47.84,143.03 90 top
R643  (101)  [R0805]  31.71,133.51 0 top
R644  (1002)  [R0805]  17.23,165.77 90 top
R645  2702  [R0805]  19.39,174.78 0 top
R646  (1002)  [R0805]  7.96,133 180 top
SJ101  [SJ]  127.89,76.24 90 bottom
SJ201  [SJ]  75.29,76.24 90 bottom
SJ301  [SJ]  22.69,76.24 90 bottom
SJ401  [SJ]  127.89,172.24 90 bottom
SJ501  [SJ]  75.29,172.24 90 bottom
SJ601  [SJ]  22.69,172.24 90 bottom
START  TPSB2.0  [B2.0]  140.59,93.01 90 top
START201  TPSB2.0  [B2.0]  87.99,93.01 90 top
START301  TPSB2.0  [B2.0]  35.39,93.01 90 top
START401  TPSB2.0  [B2.0]  140.59,189.01 90 top
START501  TPSB2.0  [B2.0]  87.99,189.01 90 top
START601  TPSB2.0  [B2.0]  35.39,189.01 90 top
TP1  TPSB2.0  [B2.0]  154.94,30.27 90 top
TP2  TPSB2.0  [B2.0]  154.31,21.38 90 top
TP3  TPSB2.0  [B2.0]  149.87,27.41 90 top
TP4  TPSB2.0  [B2.0]  144.47,24.87 90 top
TP5  TPSB2.0  [B2.0]  139.07,27.41 90 top
TP6  TPSB2.0  [B2.0]  137.48,24.87 90 top
TP7  TPSB2.0  [B2.0]  131.77,27.73 90 top
TP8  TPSB2.0  [B2.0]  130.5,24.87 90 top
TP9  TPSB2.0  [B2.0]  126.69,30.27 90 top
TP10  TPSB2.0  [B2.0]  124.15,24.87 90 top
TP11  TPSB2.0  [B2.0]  119.7,30.59 90 top
TP12  TPSB2.0  [B2.0]  154.94,35.67 90 top
TP13  TPSB2.0  [B2.0]  116.46,29.51 90 top
TP14  TPSB2.0  [B2.0]  102.34,30.27 90 top
TP15  TPSB2.0  [B2.0]  101.71,21.38 90 top
TP16  TPSB2.0  [B2.0]  151.45,35.67 90 top
TP17  TPSB2.0  [B2.0]  147.96,35.67 90 top
TP18  TPSB2.0  [B2.0]  144.47,29.95 90 top
TP19  TPSB2.0  [B2.0]  141.93,41.07 90 top
TP20  TPSB2.0  [B2.0]  97.27,27.41 90 top
TP21  TPSB2.0  [B2.0]  137.48,30.27 90 top
TP22  TPSB2.0  [B2.0]  133.99,35.67 90 top
TP23  TPSB2.0  [B2.0]  129.86,35.67 90 top
TP24  TPSB1,27  [B1,27]  127.96,40.75 90 top
TP25  TPSB2.0  [B2.0]  124.02,30.33 90 top
TP26  TPSB2.0  [B2.0]  129.42,30.02 90 top
TP27  TPSB2.0  [B2.0]  91.87,24.87 90 top
TP28  TPSB2.0  [B2.0]  86.47,27.41 90 top
TP29  TPSB2.0  [B2.0]  84.88,24.87 90 top
TP30  TPSB2.0  [B2.0]  79.17,27.73 90 top
TP31  TPSB2.0  [B2.0]  77.9,24.87 90 top
TP32  TPSB2.0  [B2.0]  74.09,30.27 90 top
TP33  TPSB2.0  [B2.0]  71.55,24.87 90 top
TP34  TPSB2.0  [B2.0]  67.1,30.59 90 top
TP35  TPSB2.0  [B2.0]  98.85,35.67 90 top
TP36  TPSB2.0  [B2.0]  95.36,35.67 90 top
TP37  TPSB2.0  [B2.0]  91.87,29.95 90 top
TP38  TPSB2.0  [B2.0]  89.33,41.07 90 top
TP39  TPSB2.0  [B2.0]  84.88,30.27 90 top
TP40  TPSB2.0  [B2.0]  81.39,35.67 90 top
TP41  TPSB2.0  [B2.0]  77.26,35.67 90 top
TP42  TPSB1,27  [B1,27]  75.36,40.75 90 top
TP43  TPSB2.0  [B2.0]  71.42,30.33 90 top
TP44  TPSB2.0  [B2.0]  76.82,30.02 90 top
TP45  TPSB2.0  [B2.0]  102.34,35.67 90 top
TP46  TPSB2.0  [B2.0]  63.86,29.51 90 top
TP47  TPSB2.0  [B2.0]  49.74,30.27 90 top
TP48  TPSB2.0  [B2.0]  49.11,21.38 90 top
TP49  TPSB2.0  [B2.0]  44.66,27.41 90 top
TP50  TPSB2.0  [B2.0]  39.27,24.87 90 top
TP51  TPSB2.0  [B2.0]  33.87,27.41 90 top
TP52  TPSB2.0  [B2.0]  32.28,24.87 90 top
TP53  TPSB2.0  [B2.0]  26.57,27.73 90 top
TP54  TPSB2.0  [B2.0]  25.3,24.87 90 top
TP55  TPSB2.0  [B2.0]  21.49,30.27 90 top
TP56  TPSB2.0  [B2.0]  18.95,24.87 90 top
TP57  TPSB2.0  [B2.0]  14.5,30.59 90 top
TP58  TPSB2.0  [B2.0]  46.25,35.67 90 top
TP59  TPSB2.0  [B2.0]  42.76,35.67 90 top
TP60  TPSB2.0  [B2.0]  39.27,29.95 90 top
TP61  TPSB2.0  [B2.0]  36.73,41.07 90 top
TP62  TPSB2.0  [B2.0]  32.28,30.27 90 top
TP63  TPSB2.0  [B2.0]  28.79,35.67 90 top
TP64  TPSB2.0  [B2.0]  24.66,35.67 90 top
TP65  TPSB1,27  [B1,27]  22.76,40.75 90 top
TP66  TPSB2.0  [B2.0]  18.82,30.33 90 top
TP67  TPSB2.0  [B2.0]  24.22,30.02 90 top
TP68  TPSB2.0  [B2.0]  49.74,35.67 90 top
TP69  TPSB2.0  [B2.0]  11.26,29.51 90 top
TP139  TPSB2.0  [B2.0]  154.94,126.27 90 top
TP140  TPSB2.0  [B2.0]  154.31,117.38 90 top
TP141  TPSB2.0  [B2.0]  149.87,123.41 90 top
TP142  TPSB2.0  [B2.0]  144.47,120.87 90 top
TP143  TPSB2.0  [B2.0]  139.07,123.41 90 top
TP144  TPSB2.0  [B2.0]  137.48,120.87 90 top
TP145  TPSB2.0  [B2.0]  131.77,123.73 90 top
TP146  TPSB2.0  [B2.0]  130.5,120.87 90 top
TP147  TPSB2.0  [B2.0]  126.69,126.27 90 top
TP148  TPSB2.0  [B2.0]  124.15,120.87 90 top
TP149  TPSB2.0  [B2.0]  119.7,126.59 90 top
TP150  TPSB2.0  [B2.0]  151.45,131.67 90 top
TP151  TPSB2.0  [B2.0]  147.96,131.67 90 top
TP152  TPSB2.0  [B2.0]  144.47,125.95 90 top
TP153  TPSB2.0  [B2.0]  141.93,137.06 90 top
TP154  TPSB2.0  [B2.0]  137.48,126.27 90 top
TP155  TPSB2.0  [B2.0]  133.99,131.67 90 top
TP156  TPSB2.0  [B2.0]  129.86,131.67 90 top
TP157  TPSB1,27  [B1,27]  127.96,136.75 90 top
TP158  TPSB2.0  [B2.0]  124.02,126.33 90 top
TP159  TPSB2.0  [B2.0]  129.42,126.02 90 top
TP160  TPSB2.0  [B2.0]  154.94,131.67 90 top
TP161  TPSB2.0  [B2.0]  116.46,125.51 90 top
TP162  TPSB2.0  [B2.0]  102.34,126.27 90 top
TP163  TPSB2.0  [B2.0]  101.71,117.38 90 top
TP164  TPSB2.0  [B2.0]  97.27,123.41 90 top
TP165  TPSB2.0  [B2.0]  91.87,120.87 90 top
TP166  TPSB2.0  [B2.0]  86.47,123.41 90 top
TP167  TPSB2.0  [B2.0]  84.88,120.87 90 top
TP168  TPSB2.0  [B2.0]  79.17,123.73 90 top
TP169  TPSB2.0  [B2.0]  77.9,120.87 90 top
TP170  TPSB2.0  [B2.0]  74.09,126.27 90 top
TP171  TPSB2.0  [B2.0]  71.55,120.87 90 top
TP172  TPSB2.0  [B2.0]  67.1,126.59 90 top
TP173  TPSB2.0  [B2.0]  98.85,131.67 90 top
TP174  TPSB2.0  [B2.0]  95.36,131.67 90 top
TP175  TPSB2.0  [B2.0]  91.87,125.95 90 top
TP176  TPSB2.0  [B2.0]  89.33,137.06 90 top
TP177  TPSB2.0  [B2.0]  84.88,126.27 90 top
TP178  TPSB2.0  [B2.0]  81.39,131.67 90 top
TP179  TPSB2.0  [B2.0]  77.26,131.67 90 top
TP180  TPSB1,27  [B1,27]  75.36,136.75 90 top
TP181  TPSB2.0  [B2.0]  71.42,126.33 90 top
TP182  TPSB2.0  [B2.0]  76.82,126.02 90 top
TP183  TPSB2.0  [B2.0]  102.34,131.67 90 top
TP184  TPSB2.0  [B2.0]  63.86,125.51 90 top
TP185  TPSB2.0  [B2.0]  49.74,126.27 90 top
TP186  TPSB2.0  [B2.0]  49.11,117.38 90 top
TP187  TPSB2.0  [B2.0]  44.66,123.41 90 top
TP188  TPSB2.0  [B2.0]  39.27,120.87 90 top
TP189  TPSB2.0  [B2.0]  33.87,123.41 90 top
TP190  TPSB2.0  [B2.0]  32.28,120.87 90 top
TP191  TPSB2.0  [B2.0]  26.57,123.73 90 top
TP192  TPSB2.0  [B2.0]  25.3,120.87 90 top
TP193  TPSB2.0  [B2.0]  21.49,126.27 90 top
TP194  TPSB2.0  [B2.0]  18.95,120.87 90 top
TP195  TPSB2.0  [B2.0]  14.5,126.59 90 top
TP196  TPSB2.0  [B2.0]  46.25,131.67 90 top
TP197  TPSB2.0  [B2.0]  42.76,131.67 90 top
TP198  TPSB2.0  [B2.0]  39.27,125.95 90 top
TP199  TPSB2.0  [B2.0]  36.73,137.06 90 top
TP200  TPSB2.0  [B2.0]  32.28,126.27 90 top
TP201  TPSB2.0  [B2.0]  28.79,131.67 90 top
TP202  TPSB2.0  [B2.0]  24.66,131.67 90 top
TP203  TPSB1,27  [B1,27]  22.76,136.75 90 top
TP204  TPSB2.0  [B2.0]  18.82,126.33 90 top
TP205  TPSB2.0  [B2.0]  24.22,126.02 90 top
TP206  TPSB2.0  [B2.0]  49.74,131.67 90 top
TP207  TPSB2.0  [B2.0]  11.26,125.51 90 top
U$1  [CE_10.00]  159.26,81.83 270 bottom
U$2  [CE_10.00]  106.66,81.83 270 bottom
U$3  [CE_10.00]  54.06,81.83 270 bottom
U$7  [CE_10.00]  159.26,177.83 270 bottom
U$8  [CE_10.00]  106.66,177.83 270 bottom
U$9  [CE_10.00]  54.06,177.83 270 bottom
X101  [24-PIN_V2]  135.7,76.56 180 bottom
X102  22-23-2021  [22-23-2021]  153.04,16.93 0 bottom
X103  22-23-2051  [22-23-2051]  111.77,26.78 90 bottom
X201  [24-PIN_V2]  83.1,76.56 180 bottom
X202  22-23-2021  [22-23-2021]  100.44,16.93 0 bottom
X203  22-23-2051  [22-23-2051]  59.16,26.78 90 bottom
X301  [24-PIN_V2]  30.5,76.56 180 bottom
X302  22-23-2021  [22-23-2021]  47.84,16.93 0 bottom
X303  22-23-2051  [22-23-2051]  6.57,26.78 90 bottom
X401  [24-PIN_V2]  135.7,172.56 180 bottom
X402  22-23-2021  [22-23-2021]  153.04,112.94 0 bottom
X403  22-23-2051  [22-23-2051]  111.77,122.78 90 bottom
X501  [24-PIN_V2]  83.1,172.56 180 bottom
X502  22-23-2021  [22-23-2021]  100.44,112.94 0 bottom
X503  22-23-2051  [22-23-2051]  59.16,122.78 90 bottom
X601  [24-PIN_V2]  30.5,172.56 180 bottom
X602  22-23-2021  [22-23-2021]  47.84,112.94 0 bottom
X603  22-23-2051  [22-23-2051]  6.57,122.78 90 bottom

## Library data of the parts
1-6 13-18 = con WAGO BMW
6V 6V201 6V301 6V401 6V501 6V601 10V 10V201 10V301 10V401 10V501 10V601 START START201 START301 START401 START501 START601 TP1-TP69 TP139-TP207 = testpin_BMW
C101 C201 C301 C401 C501 C601 = Seeed-Capacitor-2016; MPN: CC0805KKX5R8BB475
C102-C106 C109 C110 C202-C206 C209 C210 C302-C306 C309 C310 C402-C406 C409 C410 C502-C506 C509 C510 C602-C606 C609 C610 = Seeed-Capacitor-2016; MPN: CC0805KRX7R9BB104
C107 C108 C207 C208 C307 C308 C407 C408 C507 C508 C607 C608 = Seeed-Capacitor-2016; MPN: GRM31CR60J107ME39L
D101 D104 D201 D204 D301 D304 D401 D404 D501 D504 D601 D604 = Suppressor_Diode_DO214AA
D102 D103 D105 D106 D111 D112 D202 D203 D205 D206 D211 D212 D302 D303 D305 D306 D311 D312 D402 D403 D405 D406 D411 D412 D502 D503 D505 D506 D511 D512 D602 D603 D605 D606 D611 D612 = Diode-do214ac; MPN: 1N4007
D107-D110 D207-D210 D307-D310 D407-D410 D507-D510 D607-D610 = Diode-do214ac
FID1 FID1B FID2 FID2B FID101-FID104 FID201-FID204 FID301-FID304 FID401-FID404 FID501-FID504 FID601-FID604 = Fiducial
IC101 IC109 IC201 IC209 IC301 IC309 IC401 IC409 IC501 IC509 IC601 IC609 = linear_BMW
IC102 IC104 IC202 IC204 IC302 IC304 IC402 IC404 IC502 IC504 IC602 IC604 = 78LXX
IC103 IC203 IC303 IC403 IC503 IC603 = v-reg
IC105 IC205 IC305 IC405 IC505 IC605 = 4028
IC106 IC206 IC306 IC406 IC506 IC606 = NUP4304_ESD_Diode_Array
IC107 IC207 IC307 IC407 IC507 IC607 = uln-udn
IC108 IC208 IC308 IC408 IC508 IC608 = LM339
IC110 IC210 IC310 IC410 IC510 IC610 = linear
IC111 IC211 IC311 IC411 IC511 IC611 = 45xx
JP101-JP105 JP201-JP205 JP301-JP305 JP401-JP405 JP501-JP505 JP601-JP605 = Switch Aliexpress 2
LED101-LED106 LED201-LED206 LED301-LED306 LED401-LED406 LED501-LED506 LED601-LED606 = led
Q101-Q105 Q201-Q205 Q301-Q305 Q401-Q405 Q501-Q505 Q601-Q605 = Transistor_SOT89
Q106 Q107 Q206 Q207 Q306 Q307 Q406 Q407 Q506 Q507 Q606 Q607 = Seeed-Transistor-2016; MPN: BSS138W-7-F
R101 R112-R114 R128 R201 R212-R214 R228 R301 R312-R314 R328 R401 R412-R414 R428 R501 R512-R514 R528 R601 R612-R614 R628 = Seeed-Resistor-2016; MPN: RC0805JR-071KL
R102 R106 R118 R134 R202 R206 R218 R234 R302 R306 R318 R334 R402 R406 R418 R434 R502 R506 R518 R534 R602 R606 R618 R634 = Seeed-Resistor-2016; MPN: RC1206JR-0713RL
R103 R104 R127 R129 R136 R137 R203 R204 R227 R229 R236 R237 R303 R304 R327 R329 R336 R337 R403 R404 R427 R429 R436 R437 R503 R504 R527 R529 R536 R537 R603 R604 R627 R629 R636 R637 = rcl
R105 R116 R117 R122 R123 R126 R145 R146 R205 R216 R217 R222 R223 R226 R245 R246 R305 R316 R317 R322 R323 R326 R345 R346 R405 R416 R417 R422 R423 R426 R445 R446 R505 R516 R517 R522 R523 R526 R545 R546 R605 R616 R617 R622 R623 R626 R645 R646 = Seeed-Resistor-2016; MPN: RC0805JR-074K7L
R107-R111 R120 R121 R124 R125 R130-R132 R135 R140 R141 R144 R207-R211 R220 R221 R224 R225 R230-R232 R235 R240 R241 R244 R307-R311 R320 R321 R324 R325 R330-R332 R335 R340 R341 R344 R407-R411 R420 R421 R424 R425 R430-R432 R435 R440 R441 R444 R507-R511 R520 R521 R524 R525 R530-R532 R535 R540 R541 R544 R607-R611 R620 R621 R624 R625 R630-R632 R635 R640 R641 R644 = Seeed-Resistor-2016; MPN: RC0805FR-0710KL
R115 R215 R315 R415 R515 R615 = Seeed-Resistor-2016; MPN: RC0805JR-07220RL
R119 R133 R138 R139 R219 R233 R238 R239 R319 R333 R338 R339 R419 R433 R438 R439 R519 R533 R538 R539 R619 R633 R638 R639 = Seeed-Resistor-2016; MPN: RC0805JR-072K2L
R142 R143 R242 R243 R342 R343 R442 R443 R542 R543 R642 R643 = Seeed-Resistor-2016; MPN: RC0805JR-07100RL
SJ101 SJ201 SJ301 SJ401 SJ501 SJ601 = solder-jumper
U$1-U$3 U$7-U$9 = logo
X101 X201 X301 X401 X501 X601 = con_BMW
X102 X202 X302 X402 X502 X602 = con_Molex_BMW; MF: MOLEX; MPN: 22-23-2021; OC_FARNELL: 1462926; OC_NEWARK: 25C3832
X103 X203 X303 X403 X503 X603 = con_Molex_BMW; MF: MOLEX; MPN: 22-23-2051; OC_FARNELL: 1462952; OC_NEWARK: 38C9178